# EAGLE board PCB moved parts 2 (EAGLE 8.7.0)
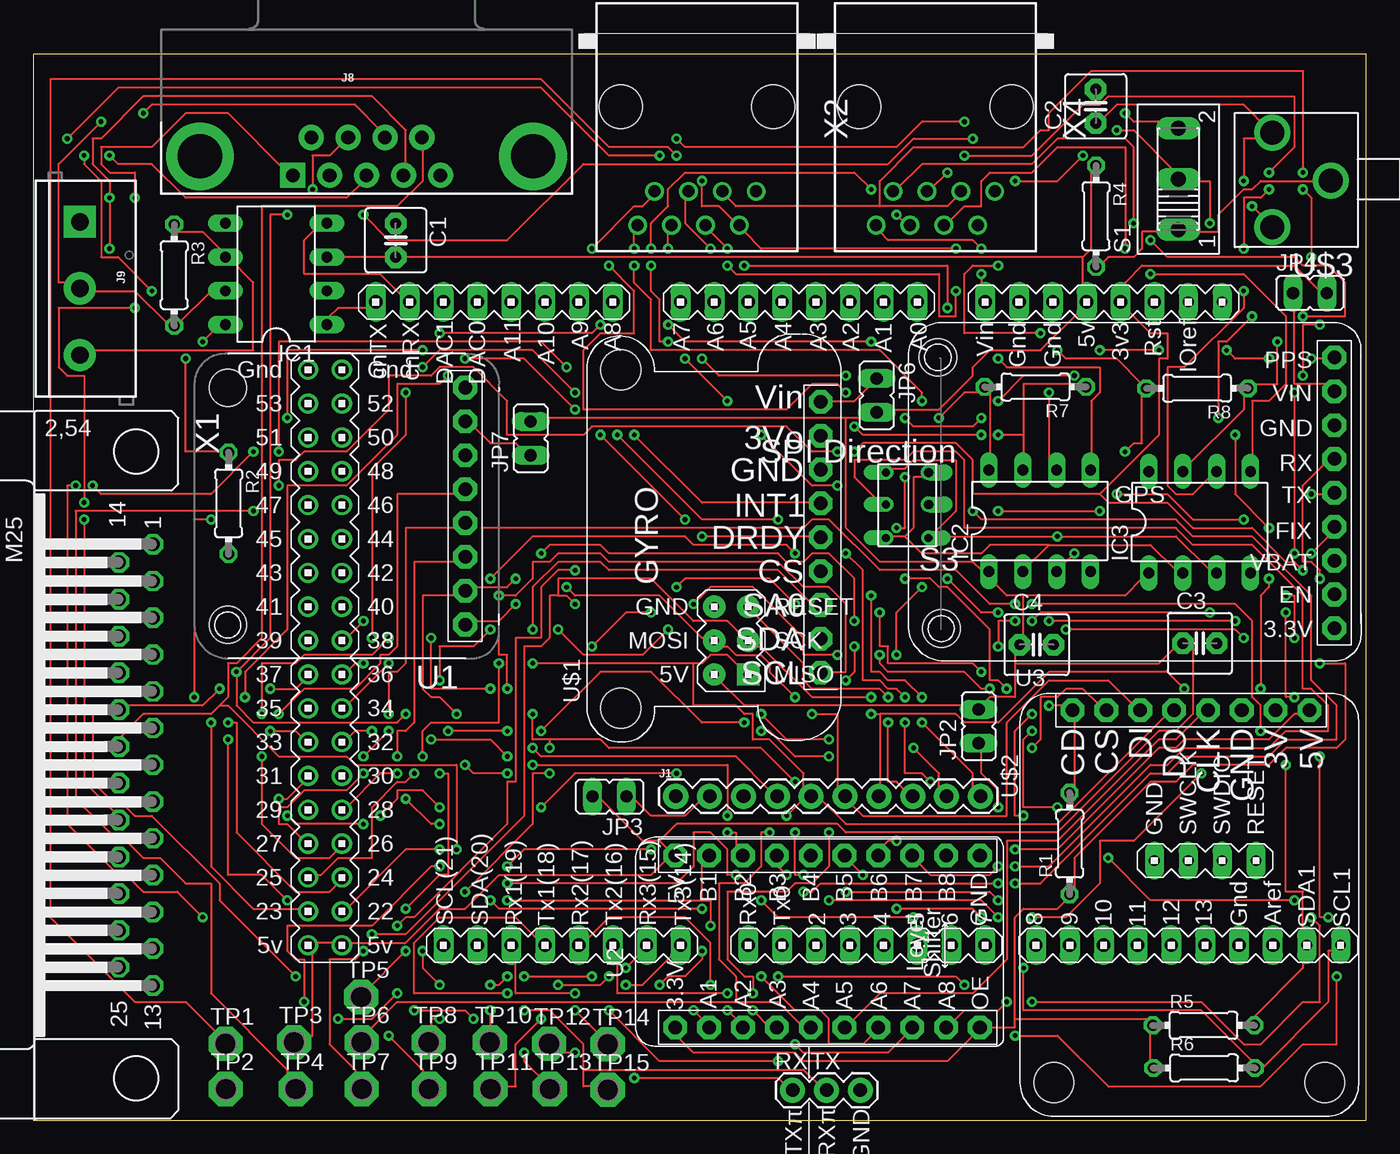
[diagram p0: board, top side]
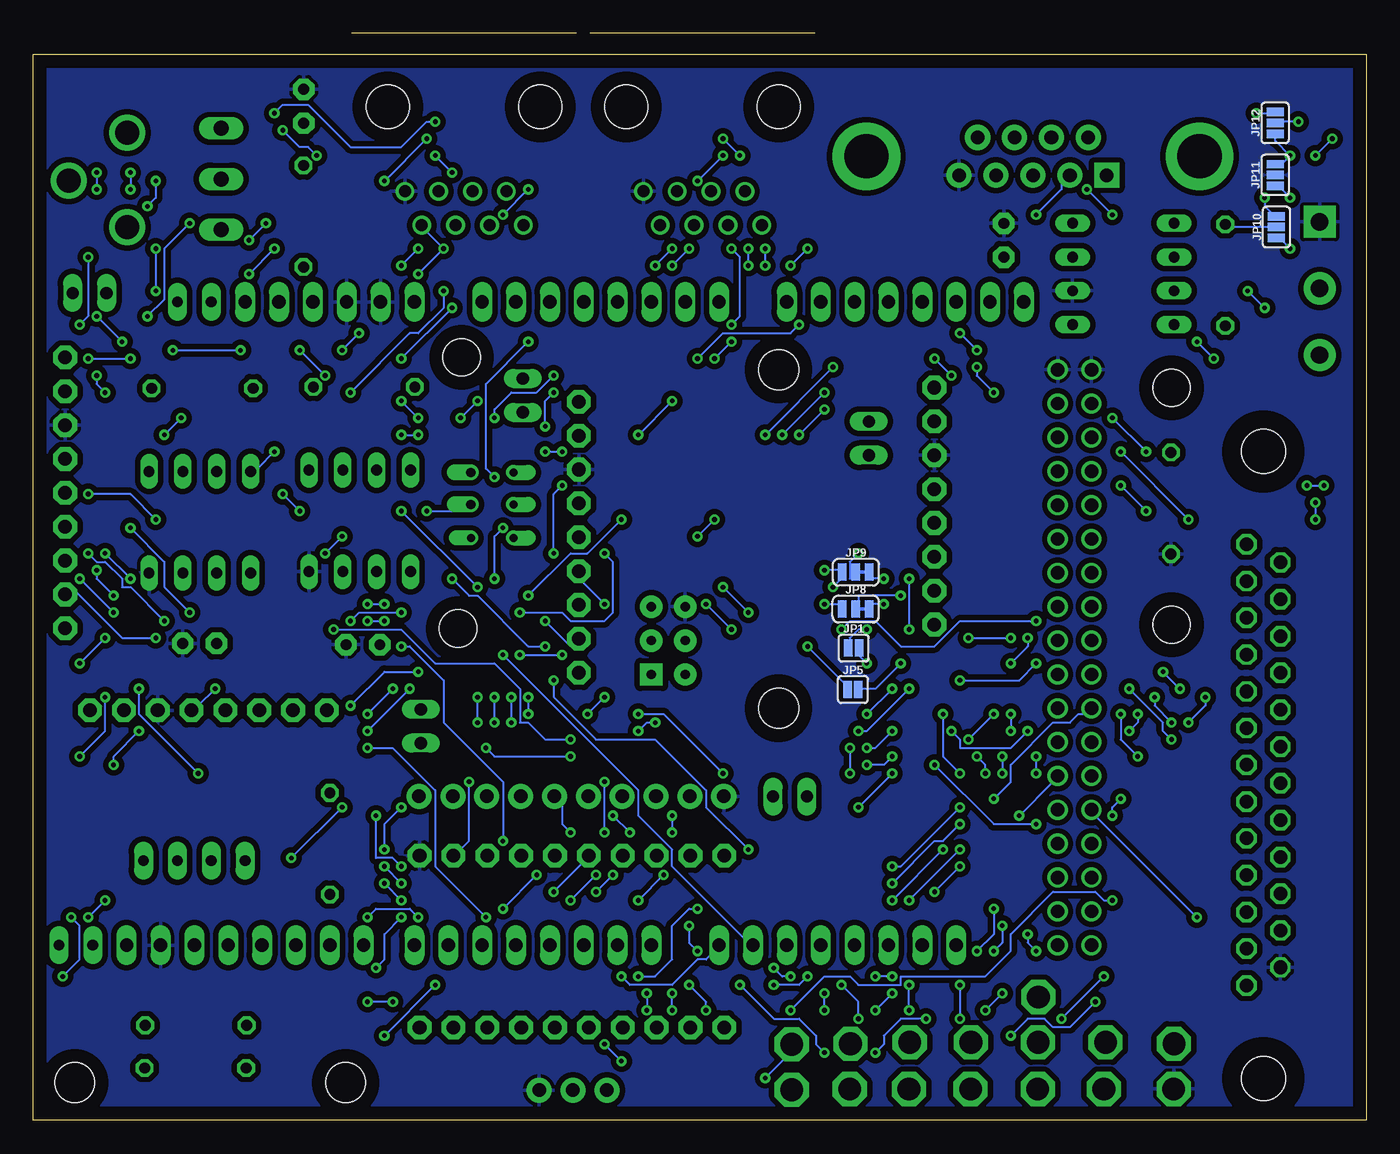
[diagram p1: board, bottom side, seen from below]

Size 100 x 80 mm. Coordinates in mm from the lower left corner, seen from the top.
Outline: 0,0 100,0 100,80 0,80 0,0
Copper layers (1*16): Top 0.035mm / dielectric 1.5mm / Bottom 0.035mm
Design rules "default": minimum track width 6mil, minimum drill 0.35mm, track to track 6mil, track to pad 6mil, pad to pad 6mil, via to via 6mil, smd to smd 6mil, copper to edge 40mil, drill to drill 6mil, minimum pad ring 10mil, minimum via ring 8mil, stop-mask expansion 4mil, vias tented up to drill 0mil, thermal gap 10mil
Net classes: 1 Power: width 0.508 mm, drill 0.305 mm, clearance 0.254 mm

## Footprints (pad centres in the part's own frame; a part is rotated, then mirrored left to right if it is on the bottom)
C2.5-5 = drill 0.813 pad 1.6 octagon: 1 -1.27,0; 2 1.27,0
DIL08 = drill 0.813 long: 1 -3.81,-3.81; 2 -1.27,-3.81; 3 1.27,-3.81; 4 3.81,-3.81; 5 3.81,3.81; 6 1.27,3.81; 7 -1.27,3.81; 8 -3.81,3.81
1X10 = drill 1.016 pad 1.88: 1 0,0; 2 2.54,0; 3 5.08,0; 4 7.62,0; 5 10.16,0; 6 12.7,0; 7 15.24,0; 8 17.78,0; 9 20.32,0; 10 22.86,0
1X03 = drill 1.016 pad 1.88: 1 2.54,0; 2 0,0; 3 -2.54,0
DB9_MALE = drill 1.016 pad 1.88: 1 5.54,-1.42; 2 2.77,-1.42; 3 0,-1.42; 4 -2.77,-1.42; 6 4.15,1.42; 7 1.38,1.42; 8 -1.38,1.42; 9 -4.15,1.42 | drill 1.016 pad 1.88 square: 5 -5.54,-1.42 | drill 3.302 pad 5.08: G1 -12.5,0; G2 12.5,0
SCREWTERMINAL-5MM-3 = drill 1.3 pad 2.413 square: 1 0,0 | drill 1.3 pad 2.413: 2 5,0; 3 10,0
SMT-JUMPER_2_NO_SILK = smd 0.635 x 1.27: 1 -0.406,0; 2 0.406,0
JP1 = drill 0.914 long: 1 0,-1.27; 2 0,1.27
SMT-JUMPER_3_1-NC_TRACE_SILK = smd 0.635 x 1.27: 1 -1.016,0; 2 0,0; 3 1.016,0
SMT-JUMPER_3_NO_SILK = smd 0.635 x 1.27: 1 -0.813,0; 2 0,0; 3 0.813,0
DUE(NORMAL) = drill 1 long: 2 -16.51,30.48; 3 -19.05,30.48; 3V3 -39.37,-17.78; 4 -21.59,30.48; 5 -24.13,30.48; 5V -36.83,-17.78; 6 -26.67,30.48; 7 -29.21,30.48; 8 -33.02,30.48; 9 -35.56,30.48; 10 -38.1,30.48; 11 -40.64,30.48; 12 -43.18,30.48; 13 -45.72,30.48; A0 -24.13,-17.78; A1 -21.59,-17.78; A2 -19.05,-17.78; A3 -16.51,-17.78; A4 -13.97,-17.78; A5 -11.43,-17.78; A6 -8.89,-17.78; A7 -6.35,-17.78; A8 -1.27,-17.78; A9 1.27,-17.78; A10 3.81,-17.78; A11 6.35,-17.78; AREF -50.8,30.48; CANRX 13.97,-17.78; CANTX 16.51,-17.78; DAC0 8.89,-17.78; DAC1 11.43,-17.78; GND1 -48.26,30.48; GND_1 -34.29,-17.78; GND_2 -31.75,-17.78; RESET -41.91,-17.78; RX0 -11.43,30.48; RX1 6.35,30.48; RX2 1.27,30.48; RX3 -3.81,30.48; SCL 11.43,30.48; SDA 8.89,30.48; TX0 -13.97,30.48; TX1 3.81,30.48; TX2 -1.27,30.48; TX3 -6.35,30.48; VIN -29.21,-17.78 | drill 1: 5V_A 19.05,30.48; 5V_B 21.59,30.48; 22 19.05,27.94; 23 21.59,27.94; 24 19.05,25.4; 25 21.59,25.4; 26 19.05,22.86; 27 21.59,22.86; 28 19.05,20.32; 29 21.59,20.32; 30 19.05,17.78; 31 21.59,17.78; 32 19.05,15.24; 33 21.59,15.24; 34 19.05,12.7; 35 21.59,12.7; 36 19.05,10.16; 37 21.59,10.16; 38 19.05,7.62; 39 21.59,7.62; 40 19.05,5.08; 41 21.59,5.08; 42 19.05,2.54; 43 21.59,2.54; 44 19.05,0; 45 21.59,0; 46 19.05,-2.54; 47 21.59,-2.54; 48 19.05,-5.08; 49 21.59,-5.08; 50 19.05,-7.62; 51 21.59,-7.62; 52 19.05,-10.16; 53 21.59,-10.16; GND_A 19.05,-12.7; GND_B 21.59,-12.7 | drill 0.7 pad 1.676: 5V_ICSP -8.89,5.08; GND_ICSP -8.89,10.16; MOSI_ICSP -8.89,7.62; RESET_ICSP -11.43,5.08; SCK_ICSP -11.43,7.62 | drill 0.8 pad 1.422 long: GND_DEBUG -41.91,24.13; IOREF -44.45,-17.78; NC -46.99,-17.78; RESET_DEBUG -49.53,24.13; SCL1 -55.88,30.48; SDA1 -53.34,30.48; SWCLK_DEBUG -44.45,24.13; SWDIO_DEBUG -46.99,24.13 | drill 0.7 pad 1.676 square: MISO_ICSP -11.43,10.16
0204/7 = drill 0.813 octagon: 1 -3.81,0; 2 3.81,0
255SB = drill 1.118 long: 1 -3.81,0; 2 0,0; 3 3.81,0
DPDT = drill 0.6 offset: 1 3.2,4.9; 2 3.2,2.4; 3 3.2,0; 4 0,4.9 | drill 0.7 offset: 5 0,2.4; 6 0,0
P1-17 = drill 1.702 pad 2.54 octagon: TP 0,0
ELCOMPASS = drill 1.016 pad 1.778 octagon: 1 1.27,1.27; 2 1.27,3.81; 3 1.27,6.35; 4 1.27,8.89; 5 1.27,11.43; 6 1.27,13.97; 7 1.27,16.51; 8 1.27,19.05 | hole 2.8: 19.066,19.07; 19.066,1.29
ELSHIFTER = drill 1.016 pad 1.778 octagon: 1 0,11.43; 2 0,8.89; 3 0,6.35; 4 0,3.81; 5 0,1.27; 6 0,-1.27; 7 0,-3.81; 8 0,-6.35; 9 0,-8.89; 10 0,-11.43; 11 12.89,11.43; 12 12.89,8.89; 13 12.89,6.35; 14 12.89,3.81; 15 12.89,1.27; 16 12.89,-1.27; 17 12.89,-3.81; 18 12.89,-6.35; 19 12.89,-8.89; 20 12.89,-11.43
ELGPS = drill 1.016 pad 1.778 octagon: 1 0,-10.16; 2 0,-7.62; 3 0,-5.08; 4 0,-2.54; 5 0,0; 6 0,2.54; 7 0,5.08; 8 0,7.62; 9 0,10.16 | hole 2.8: 29.48,10.18; 29.74,-10.18
ELGYRO = drill 1.016 pad 1.778 octagon: 1 21.59,2.54; 2 19.05,2.54; 3 16.51,2.54; 4 13.97,2.54; 5 11.43,2.54; 6 8.89,2.54; 7 6.35,2.54; 8 3.81,2.54; 9 1.27,2.54 | hole 3: -1.397,17.526; 24.003,17.526
ELSDCARD = drill 1.016 pad 1.778 octagon: 1 1.27,1.27; 2 1.27,3.81; 3 1.27,6.35; 4 1.27,8.89; 5 1.27,11.43; 6 1.27,13.97; 7 1.27,16.51; 8 1.27,19.05 | hole 3: -26.67,0.127; -26.67,20.447
2.5MMJACK = drill 1.8: 1 2,5.1; 2 6.4,1.5; 3 6.4,8.6
M25H = drill 1.016 octagon: 1 -16.561,1.27; 2 -13.792,1.27; 3 -11.049,1.27; 4 -8.28,1.27; 5 -5.512,1.27; 6 -2.769,1.27; 7 0,1.27; 8 2.769,1.27; 9 5.512,1.27; 10 8.28,1.27; 11 11.049,1.27; 12 13.792,1.27; 13 16.561,1.27; 14 -15.189,-1.27; 15 -12.421,-1.27; 16 -9.652,-1.27; 17 -6.909,-1.27; 18 -4.14,-1.27; 19 -1.372,-1.27; 20 1.372,-1.27; 21 4.14,-1.27; 22 6.909,-1.27; 23 9.652,-1.27; 24 12.421,-1.27; 25 15.189,-1.27 | hole 3.302: 23.52,0; -23.52,0
RJ45-NO-SHIELD = drill 0.9 pad 1.4: 1 -4.445,6.35; 2 -3.175,8.89; 3 -1.905,6.35; 4 -0.635,8.89; 5 0.635,6.35; 6 1.905,8.89; 7 3.175,6.35; 8 4.445,8.89 | hole 3.251: -5.715,0; 5.715,0

## Placement (x,y rotation side)
C1  0.1 uF  [C2.5-5]  27.19,66.03 270 top
C2  1 uF  [C2.5-5]  79.71,76.09 90 top
C3  0.1 uF  [C2.5-5]  87.52,35.79 0 top
C4  0.1 uF  [C2.5-5]  75.27,35.69 0 top
IC1  MCP2551  [DIL08]  18.22,63.51 90 top
IC2  DS8921  [DIL08]  75.51,44.98 0 top
IC3  DS8921  [DIL08]  87.51,44.88 0 top
J1  Optical Mouse  [1X10]  48.2,24.32 0 top
J2  RaspπUart  [1X03]  59.51,2.26 180 top
J8  DB9 Plug  [DB9_MALE]  25,72.33 0 top
J9  CAN Output  [SCREWTERMINAL-5MM-3]  3.49,67.42 270 top
JP1  [SMT-JUMPER_2_NO_SILK]  38.45,35.43 0 bottom
JP2  MicroSD Power  [JP1]  70.92,29.57 0 top
JP3  Mouse Power  [JP1]  43.23,24.3 90 top
JP4  GPS Power  [JP1]  95.78,62.07 270 top
JP5  [SMT-JUMPER_2_NO_SILK]  38.51,32.33 0 bottom
JP6  Gyro Power  [JP1]  63.28,54.39 180 top
JP7  Compass Power  [JP1]  37.31,51.17 0 top
JP8  [SMT-JUMPER_3_1-NC_TRACE_SILK]  38.3,38.37 0 bottom
JP9  [SMT-JUMPER_3_1-NC_TRACE_SILK]  38.29,41.13 0 bottom
JP10  [SMT-JUMPER_3_NO_SILK]  6.73,67.02 90 bottom
JP11  [SMT-JUMPER_3_NO_SILK]  6.83,70.93 90 bottom
JP12  [SMT-JUMPER_3_NO_SILK]  6.83,74.84 90 bottom
MCU2  DUE(NORMAL)  [DUE(NORMAL)]  42.2,43.62 180 top
R1  4.7 k  [0204/7]  77.75,20.76 90 top
R2  10 k  [0204/7]  14.65,46.3 270 top
R3  120  [0204/7]  10.57,63.42 270 top
R4  4.7 k  [0204/7]  79.73,67.84 270 top
R5  4.7 k  [0204/7]  87.8,7.13 0 top
R6  4.7 k  [0204/7]  87.84,3.93 0 top
R7  100  [0204/7]  75.18,55.03 180 top
R8  100  [0204/7]  87.32,54.93 180 top
S1  Click Source  [255SB]  85.91,70.63 90 top
S3  SPI Direction  [DPDT]  67.17,48.61 180 top
TP1  TPPAD1-17  [P1-17]  14.42,5.75 0 top
TP2  TPPAD1-17  [P1-17]  14.44,2.35 0 top
TP3  TPPAD1-17  [P1-17]  19.56,5.85 0 top
TP4  TPPAD1-17  [P1-17]  19.68,2.35 0 top
TP5  TPPAD1-17  [P1-17]  24.6,9.25 0 top
TP6  TPPAD1-17  [P1-17]  24.62,5.85 0 top
TP7  TPPAD1-17  [P1-17]  24.64,2.35 0 top
TP8  TPPAD1-17  [P1-17]  29.66,5.85 0 top
TP9  TPPAD1-17  [P1-17]  29.68,2.35 0 top
TP10  TPPAD1-17  [P1-17]  34.25,5.85 0 top
TP11  TPPAD1-17  [P1-17]  34.3,2.35 0 top
TP12  TPPAD1-17  [P1-17]  38.7,5.75 0 top
TP13  TPPAD1-17  [P1-17]  38.75,2.35 0 top
TP14  TPPAD1-17  [P1-17]  43.1,5.7 0 top
TP15  TPPAD1-17  [P1-17]  43.1,2.3 0 top
U1  COMPASS  [ELCOMPASS]  33.67,56.25 180 top
U2  LLSHIFTER  [ELSHIFTER]  59.59,6.97 90 top
U3  GPS  [ELGPS]  97.61,47.08 180 top
U$1  Gyro  [ELGYRO]  61.61,32.32 90 top
U$2  Micro-SD  [ELSDCARD]  97.02,29.5 90 top
U$3  [2.5MMJACK]  99.36,75.6 180 top
X1  Vehicle control  [M25H]  7.71,26.67 270 top
X2  RJ45-8L-B  [RJ45-NO-SHIELD]  49.79,76.05 180 top
X4  RJ45-8L-B  [RJ45-NO-SHIELD]  67.68,76.05 180 top

## Library data of the parts
C1-C4 = capacitor-wima
IC1-IC3 = ic-package
J1 = SparkFun-Connectors; PROD_ID: CONN-11563
J2 = tx_rxRasp
J8 = SparkFun-Connectors; PROD_ID: CONN-09904; SPICEPREFIX: X
J9 = SparkFun-Connectors; PROD_ID: CONN-10134; SF_SKU: PRT-08433
JP1 JP5 JP8-JP12 = SparkFun-Jumpers
JP2-JP4 JP6 JP7 = jumper
MCU2 = DUElib130425
R1 R4-R6 = resistor
R2 R3 R7 R8 = rcl; SPICEPREFIX: R
S1 = switch
S3 U$1-U$3 = ELCano_Footprints
TP1-TP15 = testpad
U1 = ELCOMPASS
U2 = ELSHIFTER
U3 = ELGPS
X1 = con-subd; OC_FARNELL: unknown; OC_NEWARK: unknown
X2 X4 = con-tycoelectronics; MF: TYCO ELECTRONICS; MPN: RJ45-8L-B; OC_FARNELL: 1279843; OC_NEWARK: 52K4445

## Nets
+3V3: JP4.2 MCU2.3V3 R1.1 R5.1 R6.1 TP4.TP U2.1 U2.10
+5V: C1.2 C3.1 C4.1 IC1.3 IC2.1 IC3.1 JP2.2 JP3.2 JP6.2 JP7.2 MCU2.5V MCU2.5V_A MCU2.5V_B MCU2.GND_ICSP R4.1 TP3.TP U2.11
C2_RX: J8.8 TP13.TP U2.13 X1.18
C2_TX: J8.6 TP12.TP U2.12 X1.19
CANH: IC1.7 J9.2 JP12.2 R3.2
CANL: IC1.6 J9.3 JP10.2 R3.1
CANRX: IC1.4 MCU2.CANRX
CANTX: IC1.1 MCU2.CANTX
CARD_DETECT: MCU2.36 R1.2 U$2.8
CLICK: J8.4 S1.2 U2.17
CS_C5_FRONT: MCU2.37 U2.8
CS_C5_FRONT_5V: U2.18 X2.6
CS_C5_REAR: MCU2.38 U2.9
CS_C5_REAR_5V: U2.19 X4.6
CS_GYRO: JP5.2 MCU2.25
CS_MOUSE: J1.4 MCU2.32
CS_SD: MCU2.35 U$2.7
DRDY_C: MCU2.26 U1.4
DRDY_G: MCU2.24 U$1.5
EN: MCU2.31 U3.8
FIX: MCU2.30 U3.6
GND: C1.1 C2.2 C3.2 C4.2 IC1.2 IC2.4 IC3.4 J1.1 J2.3 J8.1 J9.1 JP11.2 MCU2.5V_ICSP MCU2.GND1 MCU2.GND_1 MCU2.GND_2 MCU2.GND_A MCU2.GND_B R2.2 TP2.TP U1.3 U2.20 U3.3 U$1.3 U$2.3 X1.25 X2.1 X4.1
GPS_RX: MCU2.TX3 TP10.TP U3.4
GPS_TX: MCU2.RX3 TP11.TP U3.5
I1: MCU2.27 U1.5
I2: MCU2.28 U1.6
INT1: MCU2.23 U$1.4
LED: J1.10 MCU2.34
MISO: J1.5 JP1.2 MCU2.MISO_ICSP TP6.TP U2.5 U$2.5
MISO+: IC2.6 X2.5
MISO+R: IC3.6 X4.5
MISO-: IC2.5 X2.4
MISO-R: IC3.5 X4.4
MISO_5V: S3.5 U2.15
MOSI: J1.6 JP9.1 MCU2.MOSI_ICSP TP5.TP U2.4 U$2.6
MOSI+: IC2.8 R7.2 X2.8
MOSI+R: IC3.8 R8.2 X4.8
MOSI-: IC2.7 R7.1 X2.7
MOSI-R: IC3.7 R8.1 X4.7
MOSI_5V: S3.2 U2.14
N$1: C2.1 U$3.2 U$3.3
N$2: IC2.2 IC3.2 S3.1 S3.6
N$3: IC2.3 IC3.3 S3.3 S3.4
N$4: MCU2.TX2 U2.3
N$5: MCU2.RX2 U2.2
N$6: S1.3 X1.21
N$7: R4.2 S1.1 U$3.1
N$8: JP7.1 U1.2
N$9: JP6.1 U$1.1
N$10: JP2.1 U$2.1
N$11: J8.3 JP11.3 JP12.1
N$12: MCU2.22 U2.7
N$13: J1.2 JP3.1
N$14: JP4.1 U3.2
N$15: J8.5 JP10.3
N$16: J8.7 JP12.3
N$17: IC1.8 R2.1
N$18: J8.2 JP10.1 JP11.1
N$19: JP5.1 U$1.6
N$20: JP1.1 U$1.7
N$21: JP9.2 U$1.8
N$22: JP8.2 U$1.9
NPD: J1.9 MCU2.33
PPS: MCU2.29 U3.1
RPI_RX: J2.2 MCU2.TX1 TP15.TP
RPI_TX: J2.1 MCU2.RX1 TP14.TP
RST: J1.8 MCU2.RESET_ICSP
SCK: J1.7 JP8.1 MCU2.SCK_ICSP TP7.TP U2.6 U$2.4
SCK_5V: U2.16 X2.3 X4.3
SCL1: JP8.3 MCU2.SCL1 R6.2 TP9.TP U1.8
SDA1: JP9.3 MCU2.SDA1 R5.2 TP8.TP U1.7
VIN: MCU2.VIN TP1.TP X2.2 X4.2

## Tracks (layer width: path | path; a pad name or v marks a point on that pad's centre or on a via)
+3V3  (via drill 0.35)
  Top 0.152: R6.1 83.82,4.45 83.82,6.99 R5.1 83.82,7.62 73.66,7.62 | 73.66,7.62 73.66,6.99 71.12,6.99 U2.10 70.48,6.35 68.58,4.45 57.78,4.45 57.15,5.08 49.53,5.08 48.26,6.35 U2.1 | 73.66,7.62 73.66,15.24 74.3,15.88 76.83,15.88 77.47,16.51 R1.1 78.11,17.14 78.11,19.68 83.82,25.4 85.72,25.4 87,26.67 92.71,26.67 93.98,27.94 97.79,27.94 98.42,28.57 98.42,34.29 v96.52,34.29 | JP4.2 96.52,62.23 94.61,64.14 83.19,64.14 81.92,62.87 81.92,61.59 MCU2.3V3 81.92,60.96 83.82,59.05 85.09,59.05 85.09,57.15 84.45,57.15 84.45,51.44 80.01,46.99 | v16.51,45.72 3.17,45.72 3.17,24.13 6.35,20.95 6.99,20.95 8.26,19.68 9.53,19.68 11.43,17.78 13.34,17.78 13.34,9.53 19.05,3.81 19.05,2.54 TP4.TP | v18.41,47.62 18.41,49.53 19.68,49.53 20.32,50.16 23.5,50.16 26.67,53.34 26.67,55.88 29.84,55.88 30.48,56.52 33.02,56.52 35.56,53.98 35.56,51.44 41.27,51.44 41.91,52.07 56.52,52.07 58.42,50.16 v60.33,50.16 | v61.59,50.16 62.23,50.8 69.22,50.8 70.48,49.53 70.48,46.99 80.01,46.99 | v94.61,36.2 94.61,39.37 v93.98,39.37 | v95.25,41.27 94.61,41.91 93.98,41.91 91.44,44.45 87,44.45 85.09,46.35 80.64,46.35 80.01,46.99
  Bottom 0.152: v18.41,47.62 v16.51,45.72 | v61.59,50.16 v60.33,50.16 | v94.61,36.2 v96.52,34.29 | v93.98,39.37 95.25,40.64 v95.25,41.27
+5V
  Top 0.152: IC1.3 22.23,64.77 26.67,64.77 C1.2 27.3,64.77 78.74,64.77 | 78.74,64.77 79.38,65.41 79.38,71.12 R4.1 | 78.74,64.77 78.74,61.59 MCU2.5V 78.74,60.96 75.56,57.78 71.75,57.78 70.48,56.52 70.48,55.88 67.94,53.34 63.5,53.34 JP6.2 62.87,52.7 60.96,52.7 | 46.99,20.95 45.72,20.95 42.55,24.13 JP3.2 | 46.99,20.95 47.62,20.32 U2.11 47.62,19.68 46.35,18.41 34.92,18.41 32.38,15.88 30.48,15.88 27.94,13.34 23.5,13.34 MCU2.5V_A 22.86,13.34 20.95,13.34 MCU2.5V_B 20.95,12.7 20.95,6.35 19.68,6.35 TP3.TP | 60.96,52.7 37.47,52.7 JP7.2 | 74.3,39.37 81.92,39.37 83.19,40.64 IC3.1 | 74.3,39.37 73.03,39.37 71.75,40.64 IC2.1 71.12,41.27 70.48,41.91 63.5,41.91 60.96,44.45 60.96,52.7 | 73.66,34.29 73.66,35.56 C4.1 74.3,36.2 74.3,39.37 | 73.66,34.29 73.66,31.75 71.75,31.75 71.12,31.11 JP2.2 70.48,31.11 53.34,31.11 51.44,33.02 MCU2.GND_ICSP | 73.66,34.29 84.45,34.29 85.72,35.56 C3.1 86.36,35.56 87,35.56 87,30.48 85.72,29.21 84.45,29.21 76.83,21.59 60.96,21.59 60.33,22.23 48.26,22.23 46.99,20.95
C2_RX  (via drill 0.35)
  Top 0.152: v13.97,32.38 12.7,31.11 6.99,31.11 X1.18 6.35,30.48 4.45,30.48 4.45,25.4 5.71,24.13 6.35,24.13 7.62,22.86 8.89,22.86 13.97,17.78 13.97,16.51 v19.68,10.79 | v19.05,67.94 17.78,67.94 17.78,36.2 v15.24,33.66 15.24,31.11 16.51,29.84 27.3,29.84 v27.94,30.48 | v20.95,69.85 20.95,72.39 22.23,72.39 23.5,73.66 J8.8 | v52.07,21.59 52.7,21.59 52.7,20.32 U2.13 | v52.07,22.86 52.07,26.67 v37.47,26.67 | v35.56,27.3 34.29,28.57 v29.84,28.57 | v36.83,5.08 36.83,4.45 38.73,2.54 TP13.TP | v33.02,7.62 32.38,8.26 v28.57,8.26 | v27.3,9.53 25.4,7.62 v22.86,7.62
  Bottom 0.152: v15.24,33.66 v13.97,32.38 | v20.95,69.85 v19.05,67.94 | v52.07,22.86 v52.07,21.59 | v37.47,26.67 36.2,26.67 v35.56,27.3 | v27.94,30.48 v29.84,28.57 | v36.83,5.08 36.2,5.71 36.2,6.35 34.92,7.62 v33.02,7.62 | v27.3,9.53 v28.57,8.26 | v19.68,10.79 v22.86,7.62
C2_TX  (via drill 0.35)
  Top 0.152: 13.97,31.11 14.61,31.75 14.61,34.29 15.24,34.29 17.14,36.2 17.14,68.58 27.3,68.58 29.21,70.48 29.21,73.66 J8.6 | 13.97,31.11 13.34,30.48 8.26,30.48 6.35,28.57 X1.19 | 50.16,16.51 50.16,19.68 U2.12 | v35.56,16.51 50.16,16.51 | v31.75,20.32 31.75,26.67 24.13,26.67 23.5,27.3 18.41,27.3 14.61,31.11 13.97,31.11 | TP12.TP 39.37,5.08 v40.64,5.08 | v46.99,10.16 47.62,10.79 48.9,10.79 50.16,12.06 v50.16,12.7 | v50.8,14.61 50.8,16.51 50.16,16.51
  Bottom 0.152: v31.75,20.32 v35.56,16.51 | v40.64,5.08 41.27,5.71 41.27,6.35 42.55,7.62 44.45,7.62 v46.99,10.16 | v50.16,12.7 50.8,13.34 v50.8,14.61
CANH  (via drill 0.35)
  Top 0.152: IC1.7 13.97,62.23 13.34,62.23 10.79,59.69 R3.2 10.16,59.69 7.62,62.23 3.81,62.23 J9.2 3.17,62.87 1.91,62.87 1.91,71.75 v5.08,74.93
  Bottom 0.152: v5.08,74.93 6.35,74.93 JP12.2
CANL
  Top 0.152: R3.1 10.79,66.67 12.7,66.67 13.97,65.41 IC1.6 14.61,64.77 16.51,62.87 16.51,57.78 3.81,57.78 J9.3
  Bottom 0.152: JP10.2 10.36,67.02 R3.1
CANRX
  Top 0.152: IC1.4 21.59,67.31 20.32,66.04 20.32,63.5 26.04,63.5 27.94,61.59 MCU2.CANRX
CANTX
  Top 0.152: IC1.1 22.23,60.33 22.86,60.96 25.4,60.96 MCU2.CANTX
CARD_DETECT  (via drill 0.35)
  Top 0.152: R1.2 78.11,24.77 78.11,30.48 U$2.8 77.47,31.11 v76.2,31.11 | v24.77,34.29 24.13,34.29 23.5,33.66 MCU2.36 | v30.48,33.02 30.48,35.56 33.02,35.56 v34.29,36.83 | v34.29,40.64 37.47,43.81 48.9,43.81 49.53,43.18 56.52,43.18 v57.15,42.55 | v63.5,38.1 63.5,35.56 64.14,35.56 64.14,34.29 70.48,34.29 v71.12,33.66
  Bottom 0.152: v24.77,34.29 26.04,33.02 v30.48,33.02 | v34.29,40.64 v34.29,36.83 | v57.15,42.55 56.52,41.91 56.52,38.1 57.15,37.47 59.69,37.47 60.33,38.1 v63.5,38.1 | v71.12,33.66 73.66,33.66 v76.2,31.11
CLICK  (via drill 0.35)
  Top 0.152: v81.28,74.3 82.55,74.3 85.72,71.12 S1.2 86.36,70.48 88.27,70.48 v88.27,67.31 | v78.74,72.39 76.83,70.48 v73.66,70.48 | v70.48,73.66 66.04,73.66 64.14,71.75 41.27,71.75 35.56,66.04 26.67,66.04 v24.77,67.94 | v64.77,20.95 64.14,20.95 63.5,20.32 U2.17 | v72.39,35.56 72.39,37.47 v73.66,37.47 | v74.93,37.47 75.56,38.1 v88.27,38.1 | v92.71,44.45 90.17,46.99 v90.17,51.44 | v88.9,52.7 88.9,58.42 89.53,58.42 v91.44,60.33
  Bottom 0.152: v81.28,74.3 80.01,73.03 79.38,73.03 v78.74,72.39 | v70.48,73.66 v73.66,70.48 | v24.77,67.94 22.86,69.85 22.86,70.48 J8.4 | v64.77,20.95 64.77,25.4 69.22,29.84 69.22,33.02 71.75,35.56 v72.39,35.56 | v74.93,37.47 v73.66,37.47 | v88.27,38.1 90.17,40.01 90.17,41.91 v92.71,44.45 | v88.9,52.7 v90.17,51.44 | v91.44,60.33 90.17,61.59 90.17,65.41 v88.27,67.31
CS_C5_FRONT  (via drill 0.35)
  Top 0.152: v17.78,32.38 19.68,32.38 20.32,33.02 MCU2.37 | v14.61,28.57 14.61,18.41 17.14,18.41 v19.05,16.51 | v43.18,8.26 46.99,4.45 v55.88,4.45 | v57.15,5.71 57.78,5.08 64.14,5.08 65.41,6.35 U2.8
  Bottom 0.152: v17.78,32.38 15.24,29.84 15.24,29.21 v14.61,28.57 | v19.05,16.51 19.68,16.51 20.32,17.14 23.5,17.14 26.67,13.97 26.67,12.7 28.57,10.79 34.92,10.79 34.92,10.16 38.1,10.16 38.73,10.79 40.64,10.79 v43.18,8.26 | v57.15,5.71 v55.88,4.45
CS_C5_FRONT_5V  (via drill 0.35)
  Top 0.152: v47.62,65.41 47.62,66.67 X2.6 | v47.62,59.69 48.9,58.42 v62.87,58.42 | v65.41,48.26 65.41,44.45 v64.77,44.45 | v65.41,40.64 67.31,40.64 67.94,40.01 68.58,40.01 71.75,36.83 71.75,33.02 72.39,33.02 v73.03,32.38 | v74.93,30.48 73.66,29.21 73.66,22.86 v74.3,22.86 | v72.39,19.05 71.75,18.41 67.31,18.41 66.04,19.68 U2.18
  Bottom 0.152: v47.62,65.41 46.99,64.77 46.99,60.33 v47.62,59.69 | v62.87,58.42 66.04,55.24 66.04,48.9 v65.41,48.26 | v64.77,44.45 65.41,43.81 v65.41,40.64 | v74.93,30.48 v73.03,32.38 | v74.3,22.86 74.3,19.68 73.03,19.68 v72.39,19.05
CS_C5_REAR  (via drill 0.35)
  Top 0.152: v24.77,37.47 23.5,36.2 MCU2.38 | v39.37,36.83 41.27,34.92 45.72,34.92 v47.62,36.83 | v49.53,38.73 50.8,40.01 53.98,40.01 57.78,36.2 57.78,34.92 v60.33,34.92 | v63.5,34.92 63.5,34.29 64.14,33.66 69.85,33.66 71.12,32.38 v71.75,32.38 | v74.93,29.21 74.3,28.57 74.3,23.5 v76.83,23.5 | v80.64,19.68 83.82,16.51 v94.61,16.51 | v95.89,15.24 96.52,14.61 96.52,8.89 95.25,8.89 92.08,5.71 90.81,5.71 87.63,8.89 v74.93,8.89 | v73.03,8.89 72.39,8.26 69.85,8.26 68.58,6.99 U2.9
  Bottom 0.152: v24.77,37.47 30.48,37.47 32.38,35.56 34.92,35.56 36.83,37.47 38.73,37.47 v39.37,36.83 | v49.53,38.73 v47.62,36.83 | v63.5,34.92 v60.33,34.92 | v74.93,29.21 v71.75,32.38 | v80.64,19.68 v76.83,23.5 | v95.89,15.24 v94.61,16.51 | v73.03,8.89 v74.93,8.89
CS_C5_REAR_5V  (via drill 0.35)
  Top 0.152: v64.77,67.94 65.41,67.31 X4.6 | v62.87,69.85 61.59,71.12 48.9,71.12 47.62,69.85 47.62,68.58 46.35,67.31 v46.35,65.41 | v46.35,64.14 46.35,62.23 46.99,61.59 46.99,58.42 v47.62,58.42 | v52.07,53.98 v48.9,57.15 | v54.61,51.44 58.42,47.62 v60.33,47.62 | v60.96,42.55 62.23,41.27 62.23,33.02 63.5,33.02 64.14,32.38 64.77,32.38 v65.41,31.75 | v65.41,29.84 65.41,26.04 66.67,26.04 v67.31,25.4
  Bottom 0.152: v62.87,69.85 v64.77,67.94 | v46.35,64.14 v46.35,65.41 | v48.9,57.15 v47.62,58.42 | v54.61,51.44 v52.07,53.98 | v60.33,47.62 60.96,46.99 v60.96,42.55 | v65.41,29.84 v65.41,31.75 | v67.31,25.4 67.31,20.95 67.94,20.32 U2.19
CS_GYRO  (via drill 0.35)
  Top 0.152: v34.92,34.29 34.92,29.84 29.84,29.84 29.21,29.21 v29.21,27.3 | v28.57,26.04 27.94,25.4 27.3,25.4 25.4,23.5 25.4,19.68 22.86,19.68 21.59,18.41 20.95,18.41 MCU2.25
  Bottom 0.152: v34.92,34.29 36.83,32.38 38.1,32.38 JP5.2 | v29.21,27.3 28.57,26.67 v28.57,26.04
CS_MOUSE  (via drill 0.35)
  Top 0.152: v25.4,29.21 24.13,29.21 23.5,28.57 MCU2.32 | v35.56,29.21 v31.11,29.21 | v37.47,27.94 38.1,27.3 52.7,27.3 55.24,24.77 J1.4
  Bottom 0.152: v25.4,29.21 26.67,27.94 30.48,27.94 30.48,28.57 v31.11,29.21 | v35.56,29.21 36.83,27.94 v37.47,27.94
CS_SD  (via drill 0.35)
  Top 0.152: v27.94,24.13 29.84,22.23 v30.48,22.23 | v35.56,17.78 48.26,17.78 49.53,19.05 49.53,21.59 50.8,21.59 52.07,20.32 52.07,18.41 v52.7,18.41 | v54.61,16.51 55.88,15.24 v66.04,15.24 | v74.93,27.94 75.56,28.57 75.56,31.75 76.83,31.75 77.47,32.38 78.74,32.38 80.01,31.11 U$2.7
  Bottom 0.152: v27.94,24.13 26.67,25.4 26.67,26.67 23.5,29.84 22.23,29.84 21.59,30.48 20.95,30.48 MCU2.35 | v30.48,22.23 31.75,20.95 32.38,20.95 v35.56,17.78 | v54.61,16.51 v52.7,18.41 | v66.04,15.24 69.85,19.05 69.85,24.77 73.03,27.94 v74.93,27.94
DRDY_C  (via drill 0.35)
  Top 0.152: v17.14,27.3 17.14,22.23 19.68,19.68 22.23,19.68 22.86,20.32 MCU2.26 | v18.41,30.48 20.32,32.38 24.13,32.38 26.04,34.29 26.04,34.92 26.67,34.92 27.3,35.56 27.3,46.99 32.38,46.99 U1.4
  Bottom 0.152: v17.14,27.3 18.41,28.57 v18.41,30.48
DRDY_G  (via drill 0.35)
  Top 0.152: v14.61,29.84 15.24,29.84 15.24,21.59 19.68,17.14 22.23,17.14 22.86,17.78 MCU2.24 | v15.88,31.75 15.88,33.66 19.05,36.83 19.05,47.62 23.5,47.62 27.3,51.44 27.3,55.24 30.48,55.24 v31.11,55.88 | v32.38,57.15 36.83,57.15 v40.64,53.34 | v48.9,45.09 v42.55,51.44 | v50.16,43.81 59.05,43.81 U$1.5
  Bottom 0.152: v14.61,29.84 15.88,31.11 v15.88,31.75 | v32.38,57.15 v31.11,55.88 | v42.55,51.44 v40.64,53.34 | v50.16,43.81 v48.9,45.09
EN  (via drill 0.35)
  Top 0.152: v18.41,24.13 19.05,24.13 20.32,25.4 MCU2.31 | v19.05,22.86 19.68,22.23 v24.77,22.23 | v32.38,26.67 33.02,26.04 v35.56,26.04 | v38.1,23.5 40.64,26.04 v48.26,26.04 | v54.61,30.48 56.52,28.57 v59.69,28.57 | v77.47,36.83 90.17,36.83 v90.81,36.2
  Bottom 0.152: v18.41,24.13 19.05,23.5 v19.05,22.86 | v24.77,22.23 27.94,22.23 v32.38,26.67 | v38.1,23.5 v35.56,26.04 | v48.26,26.04 52.7,30.48 v54.61,30.48 | v59.69,28.57 61.59,28.57 62.87,29.84 63.5,29.84 63.5,32.38 65.41,34.29 69.85,34.29 72.39,36.83 v77.47,36.83 | v90.81,36.2 93.34,36.2 97.16,40.01 U3.8
FIX  (via drill 0.35)
  Top 0.152: v26.04,22.86 27.3,24.13 27.3,24.77 29.21,24.77 v30.48,23.5 | v35.56,19.05 36.83,20.32 v46.35,20.32 | v60.96,33.02 61.59,33.66 v61.59,35.56 | v68.58,40.64 71.12,38.1 v72.39,38.1 | v90.17,37.47 v76.2,37.47 | v95.89,42.55 97.79,44.45 U3.6
  Bottom 0.152: v26.04,22.86 23.5,25.4 MCU2.30 | v30.48,23.5 34.92,19.05 v35.56,19.05 | v46.35,20.32 49.53,23.5 49.53,24.77 53.34,28.57 57.78,28.57 60.96,31.75 v60.96,33.02 | v61.59,35.56 62.87,35.56 66.67,39.37 67.31,39.37 v68.58,40.64 | v72.39,38.1 75.56,38.1 v76.2,37.47 | v90.17,37.47 92.71,40.01 93.34,40.01 93.34,40.64 94.61,41.91 95.25,41.91 v95.89,42.55
GND
  pour Bottom (isolate 0.406): 0,80 100,80 100,0 0,0 0,1.1
GPS_RX  (via drill 0.35)
  Top 0.152: v44.45,10.16 45.72,10.16 48.26,12.7 MCU2.TX3 | v36.83,10.79 v41.91,10.79 | v35.56,10.79 34.92,10.16 v34.29,10.16 | v34.29,8.26 34.29,6.35 TP10.TP | v96.52,40.64 96.52,41.27 95.89,41.91 95.25,41.91 95.25,47.62 97.16,49.53 U3.4 | v93.98,38.1 93.98,31.75 v94.61,31.75 | v96.52,27.3 96.52,15.24 v97.16,15.24 | v97.79,10.79 97.79,5.71 95.25,5.71 92.08,2.54 80.64,2.54 76.83,6.35 v73.66,6.35 | v69.85,10.16 69.22,10.79 v55.88,10.79
  Bottom 0.152: v44.45,10.16 42.55,10.16 v41.91,10.79 | v35.56,10.79 v36.83,10.79 | v34.29,8.26 v34.29,10.16 | v93.98,38.1 v96.52,40.64 | v94.61,31.75 94.61,29.21 v96.52,27.3 | v97.16,15.24 96.52,14.61 96.52,12.06 v97.79,10.79 | v69.85,10.16 v73.66,6.35 | v55.88,10.79 55.24,10.16 52.07,10.16 50.16,12.06 49.53,12.06 48.9,12.7 MCU2.TX3
GPS_TX  (via drill 0.35)
  Top 0.152: v44.45,11.43 45.72,12.7 MCU2.RX3 | v43.18,10.79 42.55,10.16 v39.37,10.16 | v38.1,7.62 36.2,5.71 36.2,2.54 34.92,2.54 TP11.TP | v95.89,46.99 97.16,46.99 U3.5 | v90.81,45.09 87,45.09 85.09,46.99 v81.28,46.99 | v72.39,45.72 v80.01,45.72 | v66.67,40.01 64.77,38.1 v64.77,34.92
  Bottom 0.152: v44.45,11.43 43.81,10.79 v43.18,10.79 | v39.37,10.16 38.1,8.89 v38.1,7.62 | v95.89,46.99 92.71,46.99 v90.81,45.09 | v80.01,45.72 v81.28,46.99 | v66.67,40.01 v72.39,45.72 | v64.77,34.92 54.61,24.77 54.61,22.86 52.07,20.32 52.07,19.05 46.35,13.34 MCU2.RX3
I1  (via drill 0.35)
  Top 0.152: v24.77,26.04 23.5,24.77 20.32,24.77 19.05,23.5 18.41,23.5 18.41,22.23 19.05,22.23 20.32,20.95 MCU2.27 | v26.67,29.21 v24.77,27.3 | v26.67,30.48 26.67,33.66 27.3,33.66 27.94,34.29 27.94,44.45 32.38,44.45 U1.5
  Bottom 0.152: v24.77,27.3 v24.77,26.04 | v26.67,30.48 v26.67,29.21
I2  (via drill 0.35)
  Top 0.152: v27.3,26.04 26.04,26.04 23.5,23.5 MCU2.28 | v27.3,27.3 27.3,29.21 27.94,29.21 28.57,29.84 28.57,41.91 32.38,41.91 U1.6
  Bottom 0.152: v27.3,27.3 v27.3,26.04
INT1  (via drill 0.35)
  Top 0.152: v13.34,29.84 13.34,19.05 16.51,15.88 20.32,15.88 MCU2.23 | v12.06,31.75 12.06,45.09 v13.34,45.09 | v18.41,50.16 18.41,58.42 38.1,58.42 v40.01,56.52 | v45.09,51.44 50.16,46.35 59.05,46.35 U$1.4
  Bottom 0.152: v13.34,29.84 12.06,31.11 v12.06,31.75 | v18.41,50.16 v13.34,45.09 | v45.09,51.44 v40.01,56.52
LED  (via drill 0.35)
  Top 0.152: v26.67,34.29 23.5,31.11 MCU2.34 | v25.4,36.2 25.4,48.9 27.94,51.44 v27.94,54.61 | v29.21,56.52 30.48,57.78 37.47,57.78 v40.64,54.61 | v43.81,51.44 50.16,45.09 v55.88,45.09 | v62.87,39.37 62.87,33.66 63.5,33.66 64.14,33.02 65.41,33.02 v66.67,31.75 | v66.67,29.84 70.48,26.04 70.48,24.77 J1.10
  Bottom 0.152: v26.67,34.29 25.4,35.56 v25.4,36.2 | v27.94,54.61 29.21,55.88 v29.21,56.52 | v43.81,51.44 v40.64,54.61 | v55.88,45.09 58.42,42.55 59.69,42.55 v62.87,39.37 | v66.67,29.84 v66.67,31.75
MISO  (via drill 0.35)
  Top 0.152: 52.7,8.89 27.3,8.89 24.77,6.35 TP6.TP | 52.7,8.89 55.88,8.89 57.78,6.99 U2.5 | 49.53,34.29 50.16,34.29 50.8,34.92 52.07,34.92 53.34,33.66 MCU2.MISO_ICSP | 49.53,34.29 v37.47,34.29 | U$2.5 85.09,30.48 76.83,22.23 60.96,22.23 59.05,24.13 58.42,24.13 J1.5 | 49.53,34.29 49.53,31.11 52.7,31.11 53.34,30.48 53.98,30.48 53.98,28.57 55.24,28.57 57.78,26.04 57.78,24.77 J1.5 | 52.7,8.89 52.7,10.79 51.44,12.06 51.44,17.78 53.34,17.78 54.61,19.05 54.61,21.59 v55.24,21.59 | v56.52,22.86 57.78,24.13 J1.5
  Bottom 0.152: v37.47,34.29 38.1,34.92 JP1.2 | v56.52,22.86 v55.24,21.59
MISO+  (via drill 0.35)
  Top 0.152: v76.2,54.61 76.2,48.9 IC2.6 | v69.22,62.23 69.22,60.33 67.94,60.33 67.94,63.5 52.7,63.5 v52.07,64.14 | v50.8,65.41 48.9,67.31 48.9,69.22 X2.5
  Bottom 0.152: v76.2,54.61 71.75,59.05 71.12,59.05 69.22,60.96 v69.22,62.23 | v50.8,65.41 v52.07,64.14
MISO+R  (via drill 0.35)
  Top 0.152: v90.81,62.23 90.81,60.96 86.36,56.52 85.09,56.52 85.09,47.62 85.72,46.99 87,46.99 88.27,48.26 IC3.6 | v90.81,65.41 90.81,69.22 92.08,69.22 v92.71,69.85 | v92.71,71.12 94.61,73.03 94.61,76.83 80.64,76.83 80.01,76.2 78.74,76.2 74.93,72.39 v69.85,72.39 | v68.58,71.12 67.31,69.85 X4.5
  Bottom 0.152: v90.81,65.41 v90.81,62.23 | v92.71,71.12 v92.71,69.85 | v68.58,71.12 v69.85,72.39
MISO-  (via drill 0.35)
  Top 0.152: v72.39,57.15 73.03,56.52 80.01,56.52 80.01,54.61 79.38,53.98 79.38,48.9 IC2.5 | v68.58,60.96 68.58,64.14 v53.34,64.14 | v52.07,65.41 50.8,66.67 X2.4
  Bottom 0.152: v68.58,60.96 v72.39,57.15 | v52.07,65.41 v53.34,64.14
MISO-R  (via drill 0.35)
  Top 0.152: v83.82,63.5 90.81,63.5 93.98,60.33 93.98,55.24 92.71,53.98 91.44,53.98 91.44,48.9 IC3.5 | v81.92,65.41 81.92,73.03 76.83,73.03 74.93,71.12 71.75,71.12 71.12,70.48 71.12,68.58 69.85,68.58 68.58,67.31 X4.4
  Bottom 0.152: v81.92,65.41 v83.82,63.5
MISO_5V  (via drill 0.35)
  Top 0.152: v70.48,45.72 71.12,45.09 85.72,45.09 87,43.81 91.44,43.81 95.89,39.37 95.89,33.02 97.79,31.11 97.79,28.57 93.98,28.57 92.71,27.3 86.36,27.3 85.09,26.04 83.82,26.04 75.56,17.78 v73.66,17.78 | v72.39,16.51 71.75,17.14 v60.96,17.14
  Bottom 0.152: v70.48,45.72 67.31,45.72 S3.5 | v72.39,16.51 v73.66,17.78 | v60.96,17.14 58.42,19.68 U2.15
MOSI  (via drill 0.35)
  Top 0.152: v53.98,8.26 55.24,6.99 U2.4 | v53.98,9.53 53.98,10.79 53.34,10.79 52.07,12.06 52.07,17.14 56.52,17.14 57.15,17.78 58.42,17.78 59.69,19.05 v59.69,21.59 | U$2.6 82.55,31.11 80.64,33.02 76.2,33.02 73.03,29.84 73.03,22.86 62.23,22.86 60.96,24.13 J1.6 60.33,24.77 60.33,30.48 v58.42,30.48 | v40.01,40.01 40.64,39.37 46.99,39.37 50.16,36.2 50.8,36.2 MCU2.MOSI_ICSP 51.44,35.56 52.07,35.56 52.7,34.92 54.61,34.92 55.24,34.29 55.24,33.66 v57.15,31.75 | v27.94,12.7 24.77,9.53 TP5.TP | v27.3,14.61 27.94,15.24 28.57,15.24 35.56,22.23 35.56,25.4 36.2,25.4 36.2,36.2 38.1,36.2 38.1,40.01 39.37,41.27 v40.64,41.27
  Bottom 0.152: v53.98,9.53 v53.98,8.26 | v59.69,21.59 60.33,22.23 60.33,24.13 J1.6 | v40.01,40.01 39.37,40.64 JP9.1 39.37,41.27 v40.64,41.27 | v27.94,12.7 27.3,13.34 v27.3,14.61 | v57.15,31.75 v58.42,30.48
MOSI+  (via drill 0.35)
  Top 0.152: IC2.8 71.75,48.9 71.75,54.61 R7.2 71.12,54.61 69.85,54.61 v67.94,52.7 | v45.09,65.41 45.09,66.67 X2.8 | v45.09,64.14 45.09,62.87 46.35,61.59 46.35,57.78 63.5,57.78 66.67,54.61 v66.67,53.98
  Bottom 0.152: v45.09,64.14 v45.09,65.41 | v67.94,52.7 v66.67,53.98
MOSI+R  (via drill 0.35)
  Top 0.152: v81.92,50.16 82.55,50.8 83.19,50.8 83.19,54.61 R8.2 83.19,55.24 81.28,57.15 77.47,57.15 v76.83,57.78 | v71.12,65.41 70.48,66.04 64.14,66.04 63.5,66.67 X4.8 | v72.39,64.14 70.48,64.14 69.85,63.5 69.85,59.05 v75.56,59.05
  Bottom 0.152: v81.92,50.16 83.19,48.9 IC3.8 | v72.39,64.14 v71.12,65.41 | v76.83,57.78 v75.56,59.05
MOSI-  (via drill 0.35)
  Top 0.152: 74.3,51.44 74.3,55.24 78.74,55.24 R7.1 | 74.3,51.44 74.3,48.9 IC2.7 | v41.91,65.41 45.09,68.58 45.72,68.58 46.35,69.22 X2.7 | v43.18,64.14 45.09,62.23 45.09,59.05 42.55,59.05 41.27,57.78 41.27,53.34 56.52,53.34 58.42,55.24 60.33,55.24 v60.96,54.61 | v61.59,52.07 62.23,51.44 v71.12,51.44 | 74.3,51.44 v72.39,51.44
  Bottom 0.152: v43.18,64.14 v41.91,65.41 | v60.96,54.61 61.59,53.98 v61.59,52.07 | v72.39,51.44 v71.12,51.44
MOSI-R  (via drill 0.35)
  Top 0.152: IC3.7 86.36,48.9 90.81,53.34 90.81,54.61 R8.1 91.44,55.24 93.34,55.24 v93.34,58.42 | v82.55,67.31 82.55,73.03 81.92,73.66 76.83,73.66 74.93,71.75 66.67,71.75 64.77,69.85 X4.7 | v83.82,66.04 85.09,64.77 94.61,64.77 95.25,64.14 97.16,64.14 98.42,62.87 98.42,60.33 v95.25,60.33
  Bottom 0.152: v83.82,66.04 v82.55,67.31 | v93.34,58.42 v95.25,60.33
MOSI_5V  (via drill 0.35)
  Top 0.152: v73.66,19.05 76.2,19.05 83.82,26.67 85.09,26.67 86.36,27.94 92.71,27.94 93.98,29.21 97.16,29.21 97.16,31.11 95.89,32.38 95.25,32.38 95.25,39.37 91.44,43.18 87,43.18 85.72,44.45 69.85,44.45 69.85,49.53 69.22,50.16 66.04,50.16 65.41,49.53 61.59,49.53 61.59,48.26 63.5,46.35 S3.2 | v72.39,17.78 59.05,17.78 58.42,17.14 v57.78,17.14 | v56.52,18.41 55.24,19.68 U2.14
  Bottom 0.152: v72.39,17.78 v73.66,19.05 | v56.52,18.41 v57.78,17.14
N$1  (via drill 0.35)
  Top 0.152: C2.1 80.01,74.93 81.28,76.2 90.81,76.2 92.71,74.3 U$3.2 92.71,73.66 90.81,73.66 v90.81,70.48 | v91.44,68.58 92.71,67.31 U$3.3
  Bottom 0.152: v91.44,68.58 90.81,69.22 v90.81,70.48
N$2
  Top 0.152: 65.41,43.81 64.14,43.81 S3.1 | 65.41,43.81 66.04,44.45 66.04,48.26 66.67,48.26 S3.6 | 76.2,43.18 83.82,43.18 85.72,41.27 IC3.2 | 76.2,43.18 74.3,41.27 IC2.2 | 65.41,43.81 66.67,42.55 71.12,42.55 71.75,43.18 76.2,43.18
N$3  (via drill 0.35)
  Top 0.152: 67.31,43.81 69.22,45.72 69.22,49.53 66.04,49.53 65.41,48.9 64.14,48.9 S3.3 | v78.11,42.55 76.83,41.27 IC2.3 | 67.31,43.81 v76.83,43.81 85.72,43.81 88.27,41.27 IC3.3 | 67.31,43.81 S3.4
  Bottom 0.152: v76.83,43.81 v78.11,42.55
N$4  (via drill 0.35)
  Top 0.152: v52.07,9.53 43.81,9.53 43.81,12.7 MCU2.TX2 | v52.07,8.26 53.34,6.99 U2.3
  Bottom 0.152: v52.07,8.26 v52.07,9.53
N$5  (via drill 0.35)
  Top 0.152: v50.8,10.16 50.8,13.34 48.9,15.24 43.18,15.24 41.27,13.34 MCU2.RX2 | v49.53,8.26 50.8,6.99 U2.2
  Bottom 0.152: v50.8,10.16 49.53,8.89 v49.53,8.26
N$6  (via drill 0.35)
  Top 0.152: v3.81,45.09 3.81,25.4 6.35,22.86 X1.21 | v3.81,46.35 3.81,55.88 2.54,55.88 1.91,56.52 1.91,60.96 v7.62,60.96 | v8.89,62.23 6.35,64.77 5.08,64.77 5.08,70.48 3.81,71.75 v3.81,72.39 | v2.54,73.66 6.35,77.47 38.1,77.47 43.18,72.39 v46.99,72.39 | v48.26,73.66 48.9,73.03 64.77,73.03 66.67,74.93 v69.85,74.93 | v81.92,75.56 82.55,74.93 85.72,74.93 S1.3
  Bottom 0.152: v3.81,46.35 v3.81,45.09 | v8.89,62.23 v7.62,60.96 | v2.54,73.66 v3.81,72.39 | v48.26,73.66 v46.99,72.39 | v69.85,74.93 70.48,74.93 72.39,73.03 76.2,73.03 79.38,76.2 81.28,76.2 v81.92,75.56
N$7
  Top 0.152: R4.2 80.01,64.14 80.64,64.77 82.55,64.77 83.19,65.41 83.19,66.67 85.72,66.67 S1.1 86.36,66.67 88.9,66.67 88.9,67.94 90.81,69.85 91.44,69.85 92.08,70.48 97.16,70.48 U$3.1
N$8
  Top 0.152: JP7.1 36.83,50.16 36.2,50.8 34.29,50.8 33.02,52.07 U1.2
N$9
  Top 0.152: JP6.1 61.59,53.98 59.69,53.98 U$1.1
N$10  (via drill 0.35)
  Top 0.152: v72.39,23.5 72.39,24.77 71.12,26.04 71.12,27.94 JP2.1 | v73.66,20.32 76.83,20.32 84.45,27.94 85.72,27.94 86.36,28.57 92.71,28.57 94.61,30.48 95.25,30.48 U$2.1
  Bottom 0.152: v72.39,23.5 73.66,22.23 v73.66,20.32
N$11  (via drill 0.35)
  Top 0.152: v5.71,72.39 6.35,71.75 8.89,71.75 11.43,69.22 23.5,69.22 24.77,70.48 J8.3
  Bottom 0.152: JP11.3 6.35,71.75 v5.71,72.39 6.83,73.5 JP12.1
N$12  (via drill 0.35)
  Top 0.152: v30.48,20.32 27.94,20.32 23.5,15.88 MCU2.22 | v34.29,16.51 34.92,15.88 v50.16,15.88 | v54.61,10.79 57.15,8.26 59.05,8.26 59.69,7.62 59.69,5.71 62.23,5.71 62.87,6.35 U2.7
  Bottom 0.152: v34.29,16.51 v30.48,20.32 | v50.16,15.88 50.8,15.88 52.07,14.61 52.07,12.06 53.34,10.79 v54.61,10.79
N$13
  Top 0.152: JP3.1 45.09,24.13 46.35,22.86 48.9,22.86 50.16,24.13 J1.2
N$14
  Top 0.152: JP4.1 94.61,61.59 94.61,55.24 97.16,55.24 U3.2
N$15  (via drill 0.35)
  Top 0.152: v7.62,69.22 7.62,71.12 5.71,71.12 5.08,71.75 5.08,73.03 8.89,73.03 11.43,75.56 14.61,75.56 19.05,71.12 J8.5
  Bottom 0.152: v7.62,69.22 7.62,68.58 6.99,67.94 JP10.3
N$16  (via drill 0.35)
  Top 0.152: v8.26,75.56 8.89,76.2 24.13,76.2 26.04,74.3 J8.7
  Bottom 0.152: v8.26,75.56 6.99,75.56 JP12.3
N$17  (via drill 0.35)
  Top 0.152: v12.7,58.42 13.97,59.69 IC1.8 | v11.43,57.15 11.43,50.16 14.61,50.16 R2.1
  Bottom 0.152: v11.43,57.15 v12.7,58.42
N$18  (via drill 0.35)
  Top 0.152: v5.71,65.41 v5.71,69.22 5.71,70.48 4.45,71.75 4.45,73.66 5.08,73.66 8.26,76.83 25.4,76.83 27.94,74.3 27.94,71.12 J8.2
  Bottom 0.152: v5.71,65.41 6.35,66.04 JP10.1 | v5.71,69.22 6.35,69.85 JP11.1
N$19  (via drill 0.35)
  Top 0.152: v41.91,35.56 44.45,38.1 v46.35,38.1 | v48.26,40.01 48.9,40.64 55.24,40.64 v57.15,38.73
  Bottom 0.152: v41.91,35.56 38.73,32.38 JP5.1 | v48.26,40.01 v46.35,38.1 | v57.15,38.73 59.05,40.64 U$1.6
N$20  (via drill 0.35)
  Top 0.152: v37.47,36.83 37.47,40.01 39.37,41.91 42.55,41.91 43.18,41.27 55.88,41.27 58.42,38.73 59.05,38.73 U$1.7
  Bottom 0.152: v37.47,36.83 38.1,36.83 38.73,36.2 38.73,35.56 JP1.1
N$21  (via drill 0.35)
  Top 0.152: v38.1,42.55 38.73,43.18 42.55,43.18 43.18,42.55 55.88,42.55 56.52,41.91 57.78,41.91 58.42,42.55 59.69,42.55 61.59,40.64 v61.59,37.47
  Bottom 0.152: v38.1,42.55 38.73,41.91 38.73,40.64 38.1,40.64 JP9.2 | v61.59,37.47 59.69,35.56 U$1.8
N$22  (via drill 0.35)
  Top 0.152: v34.92,39.37 36.2,39.37 37.47,40.64 37.47,41.91 38.73,41.91 39.37,42.55 42.55,42.55 43.18,41.91 55.88,41.91 57.78,40.01 59.69,40.01 60.96,38.73 60.96,33.66 59.69,33.66 U$1.9
  Bottom 0.152: v34.92,39.37 38.1,39.37 38.1,38.73 JP8.2
NPD  (via drill 0.35)
  Top 0.152: v17.78,29.21 19.68,29.21 20.32,28.57 MCU2.33 | v17.14,30.48 17.14,34.29 19.68,34.29 20.32,34.92 25.4,34.92 v26.67,36.2 | v29.84,36.2 29.84,32.38 v34.29,32.38 | v38.1,29.21 42.55,33.66 46.35,33.66 50.16,29.84 v53.34,29.84 | v54.61,29.21 55.24,29.21 57.15,27.3 v59.69,27.3 | v66.04,27.94 67.94,26.04 67.94,24.77 J1.9
  Bottom 0.152: v17.78,29.21 17.14,29.84 v17.14,30.48 | v29.84,36.2 v26.67,36.2 | v34.29,32.38 37.47,29.21 v38.1,29.21 | v53.34,29.84 53.98,29.84 v54.61,29.21 | v59.69,27.3 65.41,27.3 v66.04,27.94
PPS  (via drill 0.35)
  Top 0.152: v12.7,15.24 10.79,17.14 8.26,17.14 6.99,18.41 6.35,18.41 2.54,22.23 2.54,47.62 v3.17,47.62 | v4.45,47.62 5.08,46.99 13.34,46.99 v16.51,50.16 | v19.05,52.7 19.05,57.78 v29.21,57.78 | v30.48,59.05 41.91,59.05 v42.55,59.69 | v50.16,57.15 51.44,55.88 v60.96,55.88 | v65.41,52.7 66.04,52.07 70.48,52.07 v71.12,52.7 | v72.39,53.98 74.3,55.88 v78.11,55.88 | v84.45,57.78 v80.01,57.78 | v89.53,57.78 90.17,57.15 v92.71,57.15 | v95.89,57.15 97.16,57.15 U3.1
  Bottom 0.152: v12.7,15.24 20.32,22.86 MCU2.29 | v4.45,47.62 v3.17,47.62 | v19.05,52.7 v16.51,50.16 | v30.48,59.05 v29.21,57.78 | v42.55,59.69 43.18,59.05 48.26,59.05 v50.16,57.15 | v60.96,55.88 62.23,54.61 64.14,54.61 65.41,53.34 v65.41,52.7 | v72.39,53.98 v71.12,52.7 | v80.01,57.78 v78.11,55.88 | v89.53,57.78 v84.45,57.78 | v95.89,57.15 v92.71,57.15
RPI_RX  (via drill 0.35)
  Top 0.152: v35.56,9.53 28.57,9.53 28.57,13.34 30.48,15.24 36.2,15.24 38.1,13.34 MCU2.TX1 | v36.83,8.26 38.73,8.26 41.27,5.71 41.27,3.81 | 41.27,3.81 41.27,2.54 42.55,2.54 TP15.TP | 41.27,3.81 57.78,3.81 59.05,2.54 J2.2
  Bottom 0.152: v36.83,8.26 v35.56,9.53
RPI_TX  (via drill 0.35)
  Top 0.152: v40.64,9.53 36.2,9.53 36.2,12.7 MCU2.RX1 | v40.64,8.26 43.18,5.71 TP14.TP | v45.09,3.17 55.88,3.17 56.52,2.54 J2.1
  Bottom 0.152: v40.64,8.26 v40.64,9.53 | v45.09,3.17 43.18,5.08 TP14.TP
RST  (via drill 0.35)
  Top 0.152: v64.14,31.75 63.5,32.38 58.42,32.38 57.78,33.02 57.78,34.29 53.98,38.1 MCU2.RESET_ICSP | v64.14,29.84 64.14,25.4 64.77,25.4 65.41,24.77 J1.8
  Bottom 0.152: v64.14,29.84 v64.14,31.75
SCK  (via drill 0.35)
  Top 0.152: U2.6 60.96,6.99 63.5,9.53 70.48,9.53 73.03,12.06 73.03,20.95 76.83,20.95 84.45,28.57 85.72,28.57 87.63,30.48 U$2.4 | 63.5,30.48 63.5,24.77 J1.7 | 63.5,30.48 69.22,30.48 69.85,29.84 72.39,29.84 76.2,33.66 85.09,33.66 v86.36,32.38 | v40.64,38.73 40.01,39.37 39.37,39.37 | 39.37,39.37 39.37,40.64 46.35,40.64 49.53,37.47 52.07,37.47 53.34,36.2 MCU2.SCK_ICSP 53.98,35.56 54.61,35.56 58.42,31.75 v62.87,31.75 | v24.77,12.7 24.13,12.06 22.23,12.06 22.23,5.71 24.13,3.81 24.13,2.54 TP7.TP | v25.4,13.97 27.94,13.97 36.83,22.86 36.83,35.56 38.1,35.56 38.73,36.2 38.73,39.37 39.37,39.37 | v62.87,30.48 63.5,30.48
  Bottom 0.152: v86.36,32.38 87.63,31.11 U$2.4 | v40.64,38.73 39.37,38.73 JP8.1 | v24.77,12.7 25.4,13.34 v25.4,13.97 | v62.87,31.75 v62.87,30.48
SCK_5V  (via drill 0.35)
  Top 0.152: 63.5,68.58 68.58,68.58 69.22,69.22 X4.3 | 63.5,68.58 52.7,68.58 52.07,69.22 X2.3 | v62.23,18.41 60.96,19.68 U2.16 | v64.77,15.88 70.48,15.88 v71.12,15.24 | v74.93,15.24 77.47,15.24 80.01,17.78 80.01,20.95 82.55,20.95 v87.63,26.04 | v92.08,32.38 92.08,39.37 92.71,40.01 v92.71,40.64 | v94.61,54.61 v94.61,42.55 | v95.25,55.88 95.25,59.69 v96.52,59.69 | v95.89,64.77 95.89,69.22 v95.25,69.85 | v95.25,71.12 95.25,78.74 79.38,78.74 76.2,75.56 76.2,74.3 75.56,74.3 74.3,73.03 66.04,73.03 63.5,70.48 63.5,68.58
  Bottom 0.152: v64.77,15.88 v62.23,18.41 | v71.12,15.24 71.75,15.88 74.3,15.88 v74.93,15.24 | v87.63,26.04 92.08,30.48 v92.08,32.38 | v94.61,42.55 v92.71,40.64 | v94.61,54.61 95.25,55.24 v95.25,55.88 | v96.52,59.69 95.89,60.33 v95.89,64.77 | v95.25,71.12 v95.25,69.85
SCL1  (via drill 0.35)
  Top 0.152: 34.92,37.47 v36.2,38.73 | 34.92,37.47 33.02,37.47 U1.8 | MCU2.SCL1 97.79,12.7 97.16,12.7 97.16,8.89 92.08,3.81 R6.2 91.44,4.45 87.63,8.26 74.3,8.26 v74.3,11.43 | 34.92,37.47 34.92,34.92 35.56,34.92 v35.56,32.38 | v37.47,30.48 37.47,28.57 38.73,28.57 | 38.73,28.57 42.55,28.57 43.18,27.94 54.61,27.94 v57.15,25.4 | v57.15,21.59 57.15,18.41 v57.78,18.41 | v59.69,16.51 71.12,16.51 v72.39,15.24 | v26.67,6.35 29.21,3.81 29.21,2.54 TP9.TP | v20.32,8.89 20.32,12.06 19.68,12.06 19.05,12.7 19.05,14.61 25.4,14.61 29.84,19.05 v30.48,19.05 | v32.38,17.14 37.47,22.23 37.47,26.04 v38.73,26.04 | 38.73,28.57 v38.73,27.94
  Bottom 0.152: v36.2,38.73 37.47,38.73 JP8.3 | v37.47,30.48 v35.56,32.38 | v57.15,21.59 v57.15,25.4 | v59.69,16.51 v57.78,18.41 | v72.39,15.24 73.66,13.97 73.66,12.06 v74.3,11.43 | v26.67,6.35 25.4,7.62 24.13,7.62 23.5,6.99 22.23,6.99 v20.32,8.89 | v32.38,17.14 v30.48,19.05 | v38.73,27.94 v38.73,26.04
SDA1  (via drill 0.35)
  Top 0.152: v36.2,40.64 35.56,40.01 33.66,40.01 | 33.66,40.01 33.02,40.01 U1.7 32.38,39.37 29.21,39.37 29.21,32.38 29.84,31.75 30.48,31.75 v31.75,30.48 | R5.2 91.44,7.62 95.25,11.43 95.25,12.7 MCU2.SDA1 95.25,13.34 95.25,17.14 93.98,17.14 v93.98,26.67 | 33.66,40.01 33.66,44.45 57.78,44.45 58.42,45.09 59.69,45.09 63.5,41.27 69.22,41.27 71.75,38.73 v73.66,38.73 | v74.93,38.73 90.17,38.73 91.44,37.47 91.44,31.75 92.08,31.11 v92.08,29.21 | v30.48,7.62 29.84,7.62 29.84,6.35 TP8.TP | v30.48,10.16 29.21,11.43 v29.21,12.7 | v27.94,15.88 30.48,18.41 31.11,18.41 31.11,26.04 v30.48,26.04
  Bottom 0.152: v36.2,40.64 37.47,40.64 JP9.3 | v74.93,38.73 v73.66,38.73 | v92.08,29.21 93.98,27.3 v93.98,26.67 | v30.48,10.16 v30.48,7.62 | v29.21,12.7 27.94,13.97 v27.94,15.88 | v30.48,26.04 31.75,27.3 v31.75,30.48
VIN  (via drill 0.35)
  Top 0.152: v69.22,65.41 54.61,65.41 53.34,66.67 X2.2 52.7,67.31 51.44,68.58 50.16,68.58 v50.16,70.48 | v71.12,63.5 71.12,61.59 MCU2.VIN | v48.26,72.39 47.62,73.03 43.18,73.03 38.1,78.11 1.27,78.11 1.27,15.24 7.62,8.89 11.43,8.89 13.97,6.35 TP1.TP
  Bottom 0.152: X4.2 70.48,66.67 v69.22,65.41 v71.12,63.5 | v50.16,70.48 v48.26,72.39